# Altium PCB NetworkModule_highspeed V4.PcbDoc (part 3 of 3)
Units mil, origin at the board's own origin, x right, y up, seen from the top; angles counter-clockwise.
Board outline 826.77 x 1421.26 mil, 6 copper layers (Top, GND, Inner3, Inner4, PWR, Bottom), stack 29.136 mil thick; 111 components, 125 nets, 539 pads, 464 vias.
Unrouted connection lines stored in the file: 214.
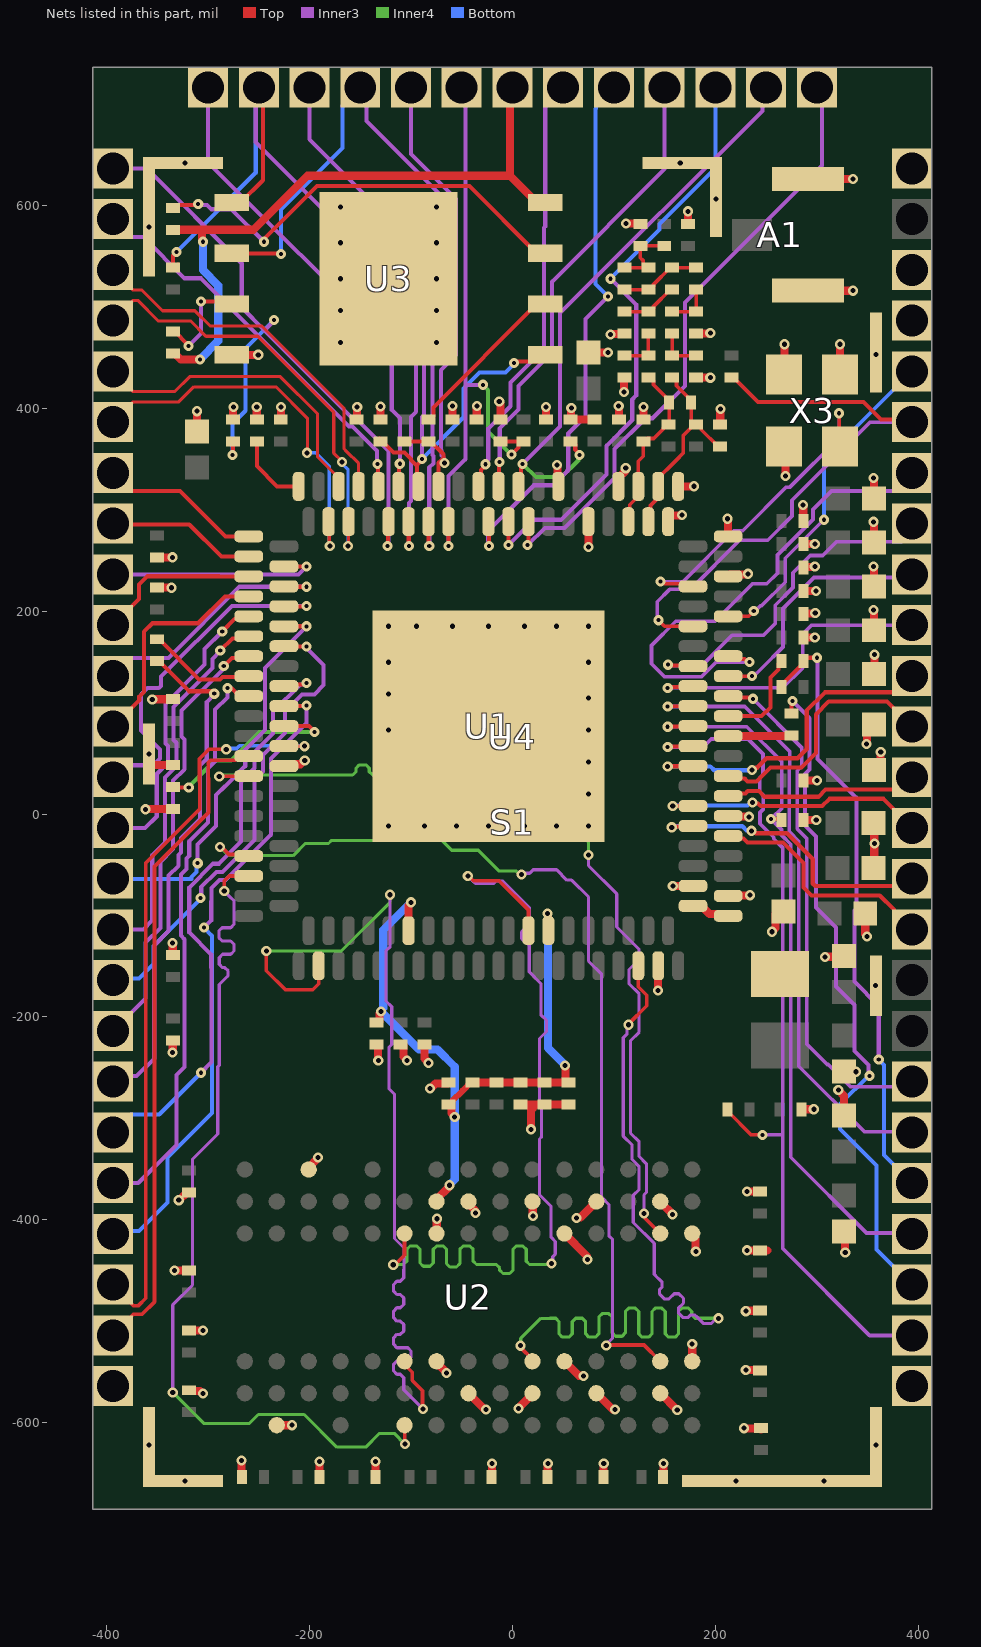
[diagram p7: the nets of this part, all layers, seen from the top]

## Via types
v1: diameter 10, hole 5, Top to Bottom, 398 vias
v2: diameter 10, hole 4, Top to Bottom, 66 vias

## Nets (pads, with @x,y where several pads share a name; then routed paths per layer and width w, separated by ;. In a path a pad name is that pad's centre, name@x,y a point inside that pad or via, vN(x,y) a via of type N, cw(c..) or ccw(c..) an arc to the next point about the centre after c; other vN are vias at no path point) (continued)
DDR_LDQS: U1.113 U2.F7 | length 891.7
  Top w3.63: v1(8,-524) 8,-525.72 20,-537.72 U2.F7@20,-538 ; v1(114.35,-207.71) 114.35,-206.92 132.27,-189 132.27,-178.52 124.02,-170.27 U1.113@124.02,-149.6
  Inner3 w3.1: v1(114.35,-207.71) 113.03,-209.03 113.03,-216.74 109.24,-220.52 109.24,-317.45 117.8,-326.01 117.8,-340.43 124.9,-347.53 124.9,-370.04 119.07,-375.86 119.07,-402.54 139.7,-423.16 139.7,-453.7 143,-457 144.1,-458.1 147.48,-461.48 147.48,-466.11 145.04,-468.55 145.04,-473.18 149.67,-477.81 154.3,-477.81 159.36,-472.76 163.99,-472.76 168.63,-477.39 168.63,-482.02 163.57,-487.08 163.57,-491.71 168.2,-496.34 172.83,-496.34 175.27,-493.9 179.9,-493.9 181,-495 188,-502 196.13,-502 201.13,-497 v1(203,-497)
  Inner4 w3.09: v1(8,-524) 8.24,-523.76 8.24,-516.79 18.66,-506.37 28,-497.03 37,-497.03 ; 37.03,-497 42.63,-497 45.9,-500.27 45.9,-512.25 49.17,-515.52 55.72,-515.52 58.99,-512.25 58.99,-500.27 62.26,-497 68.8,-497 72.07,-500.27 72.07,-512.25 75.35,-515.52 81.89,-515.52 85.16,-512.25 85.16,-495.69 88.43,-492.42 94.98,-492.42 98.25,-495.69 98.25,-511.39 101.52,-514.67 108.06,-514.67 111.33,-511.39 111.33,-490.27 114.61,-487 121.15,-487 124.42,-490.27 124.42,-512.25 127.69,-515.52 134.23,-515.52 137.51,-512.25 137.51,-490.27 140.78,-487 147.32,-487 150.59,-490.27 150.59,-512.25 153.86,-515.52 160.41,-515.52 163.68,-512.25 163.68,-490.27 166.95,-487 173.49,-487 176.77,-490.27 176.77,-493.73 180.04,-497 193,-497 v1(203,-497)
DDR_ODT: U1.74 U2.K9 | length 883
  Top w3.63: v1(-284,-76) -284,-66 -279.02,-61.02 U1.74@-259.84,-61.02 ; v1(-106,-621) -106.15,-620.85 -106.15,-601.15 U2.K9@-106,-601
  Inner3 w3.1: v1(-334.79,-570) -334.79,-483.75 -315.3,-464.27 -315.3,-340.3 -290.41,-315.41 -290.41,-249.09 -289,-247.68 -289,-168.04 -281.77,-160.81 -280.22,-159.26 -280.22,-154.63 -283.49,-151.35 -285.73,-151.35 -289,-148.08 -289,-141.52 -285.73,-138.25 -277.72,-138.25 -274.45,-134.97 -274.45,-128.42 -277.72,-125.15 -286.03,-125.15 -289.31,-121.87 -289.31,-115.32 -286.03,-112.05 -277.72,-112.05 -274.45,-108.77 -274.45,-89.87 -274.45,-85.55 -278.49,-81.51 v1(-284,-76)
  Inner4 w3.09: v1(-334.79,-570) -304.24,-600.54 -259.12,-600.54 -250.4,-591.82 -205.27,-591.82 -173.09,-624 -144.58,-624 -131.04,-610.46 -116.54,-610.46 v1(-106,-621)
DDR_RAS: U1.81 U2.K7 | length 892.3
  Top w3.63: v1(-242.59,-135) -242.59,-154.41 -223.77,-173.23 -196.85,-173.23 -190.95,-167.32 U1.81@-190.95,-149.6 ; U2.K7@-106.3,-539.37 -106.3,-542.72 -98.79,-550.22 -98.79,-558.21 -88.62,-568.38 -88.62,-585.93 v1(-88.24,-586.32)
  Inner3 w3.1: v1(-120.55,-79.6) -120.55,-130.84 -124.65,-134.94 -124.65,-184.31 -119.02,-189.95 -119.02,-227.13 -121.65,-229.76 -121.65,-270.77 -116.22,-276.2 -116.22,-418.41 -106.9,-427.73 -106.9,-448.62 -107.14,-448.85 -107.14,-453 -107.14,-457.19 -110.42,-460.46 -113.87,-460.46 -117.14,-463.74 -117.14,-470.29 -113.87,-473.56 -110.42,-473.56 -107.14,-476.84 -107.14,-483.39 -110.42,-486.67 -113.87,-486.67 -117.14,-489.94 -117.14,-496.49 -113.87,-499.77 -110.42,-499.77 -107.14,-503.04 -107.14,-509.59 -110.42,-512.87 -113.87,-512.87 -117.14,-516.14 -117.14,-522.7 -113.87,-525.97 -103.23,-525.97 -99.95,-529.25 -99.95,-535.8 -103.23,-539.07 -113.87,-539.07 -117.14,-542.35 -117.14,-548.9 -113.87,-552.17 -110.42,-552.17 -107.14,-555.45 -107.14,-557 -107.14,-567.47 -88.3,-586.32 v1(-88.24,-586.32)
  Inner4 w3.09: v1(-242.59,-135) -168.71,-135 -120.55,-86.84 v1(-120.55,-79.6)
DDR_UDM: U1.64 U2.B3 | length 902.7
  Top w3.63: v1(-288.98,37.02) -288.79,37.21 -260.03,37.21 U1.64@-259.84,37.4 ; v1(129.62,-393.67) 130.84,-394.88 130.84,-398.56 U2.B3@145.67,-413.39
  Inner3 w3.1: v1(75,-40.5) 75,-50.91 102.8,-78.71 102.8,-111.39 124.9,-133.49 124.9,-143.26 114.9,-153.26 114.9,-167.28 124.9,-177.28 124.9,-214.91 116.34,-223.46 116.34,-314.51 124.9,-323.07 124.9,-337.49 132,-344.59 132,-372.98 129.62,-375.35 v1(129.62,-393.67)
  Inner4 w3.09: v1(-288.98,37.02) -287.68,38.32 -283.84,38.32 -283.74,38.43 -159,38.43 -157.46,38.43 -154.18,41.7 -154.18,45.16 -150.91,48.43 -144.37,48.43 -141.1,45.16 -141.1,41.7 -137.83,38.43 -131.28,38.43 -128.01,41.7 -128.01,45.16 -124.74,48.43 -118.2,48.43 -114.93,45.16 -114.93,41.7 -111.65,38.43 -105.11,38.43 -101.84,41.7 -101.84,45.16 -98.57,48.43 -92.02,48.43 -88.75,45.16 -88.75,41.7 -85.48,38.43 -78.94,38.43 -75.67,41.7 -75.67,45.16 -72.39,48.43 -65.85,48.43 -62.58,45.16 -62.58,41.7 -59.31,38.43 -43,38.43 8.57,38.43 75,-28 v1(75,-40.5)
DDR_UDQS: U1.72 U2.B7 | length 947.3
  Top w3.63: v1(-288.38,-32.62) -286.66,-32.62 -279.47,-39.81 -261.37,-39.81 U1.72@-259.84,-41.34 ; v1(92.45,-523.78) 92.92,-523.3 129.6,-523.3 U2.B7@145.67,-539.37
  Inner3 w3.1: v1(9.07,-59.72) 10.39,-58.4 16.97,-58.4 20.39,-54.98 43.52,-54.98 53.65,-65.11 58.33,-65.11 74.9,-81.68 74.9,-144.94 87.93,-157.98 87.93,-377.7 95.04,-384.81 95.04,-415.62 98.74,-419.33 98.74,-516.42 92.45,-522.72 v1(92.45,-523.78)
  Inner4 w3.09: v1(-288.38,-32.62) -287.95,-32.62 -279.57,-41 -216.11,-41 -204.19,-29.09 -181.27,-29.09 -178.12,-25.93 -130.96,-25.93 -130.41,-25.38 -70.19,-25.38 -59.83,-35.74 -33.54,-35.74 -13.01,-56.26 3.74,-56.26 7.2,-59.72 v1(9.07,-59.72)
DDR_VREF: C4.1 C5.1 C11.2 C12.1 C13.1 R1.1 R2.2 U1.90 U1.104 U2.J2 | length 728.7
  Top w6: C4.1@-61.02,-286.42 -59.1,-284.5 -59.1,-282.58 -49.1,-272.58 -49.1,-272.53 -40.57,-264 C11.2@-38,-264
  Top w8: C12.1@-133.8,-205.1 -133.49,-204.79 -130.97,-204.79 -130.97,-196.53 -129.57,-195.12 v1(-129.57,-194.58) ; U1.90@-102.36,-114.96 -102.36,-90.03 -99.9,-87.57 v1(-99.9,-87.03) ; U2.J2@-74.8,-381.89 -74.8,-379.73 -62.51,-367.43 -62.51,-366.25 v1(-62.13,-365.87) ; C4.1@-62.99,-286.42 -61.02,-286.42 -60.1,-287.34 -60.1,-294.97 -56.9,-298.17 v1(-56.9,-298.71) ; C11.2@-39.37,-264.76 R1.1@-15.75,-264.76 R2.2@7.87,-264.76 C13.1@31.5,-264.76 52.23,-264.76 52.23,-248.78 51.76,-248.32 v1(51.76,-247.77) ; v1(34.7,-97.98) 35.07,-98.35 35.07,-114.59 U1.104@35.43,-114.96
  Bottom w8: v1@-129.57,-194.04 -128.57,-193.04 -128.57,-192.26 -127.34,-191.03 -127.34,-114.47 v1@-100.29,-87.41 ; v1@-129.15,-195 -92.15,-232 -74,-232 -56.9,-249.1 -56.9,-299.26 -56.9,-360.19 -62.13,-365.42 v1(-62.13,-365.87) ; v1(34.7,-97.98) 35,-98.28 35,-230.47 51.76,-247.23 v1(51.76,-247.77)
DDR_WE: U1.102 U2.K3 | length 877.7
  Top w3.63: v1(-117.46,-444.2) -115.73,-444.2 -110.51,-438.98 ; -110.47,-438.98 -106.39,-434.91 -106.39,-414.39 U2.K3@-106,-414 ; v1(-44,-61) -43.45,-61 -38.69,-65.76 -13.18,-65.76 15.75,-94.69 U1.102@15.75,-114.96
  Inner3 w3.1: v1(-44,-61) -36.47,-68.53 -18.48,-68.53 -16.01,-66.06 -9.62,-66.06 16.61,-92.29 16.61,-95 16.61,-109.65 13.34,-112.93 12.18,-112.93 8.91,-116.2 8.91,-122.75 12.18,-126.03 13.34,-126.03 16.61,-129.3 16.61,-145 16.61,-155.61 28,-167 28,-177.62 28,-197.88 33.53,-203.4 33.53,-214.32 26.63,-221.22 26.63,-283.52 28.75,-285.65 28.75,-318.23 26.63,-320.35 26.63,-375.29 38.1,-386.76 38.1,-417.27 42.13,-421.3 42.13,-433.74 39.67,-436.2 39.67,-441.56 v1(38.35,-442.88)
  Inner4 w3.09: v1(-117.46,-444.2) -117.25,-444 -109,-444 -107.46,-444 -104.18,-440.73 -104.18,-429 -100.91,-425.73 -94.37,-425.73 -91.1,-429 -91.1,-442.45 -87.83,-445.72 -81.28,-445.72 -78.01,-442.45 -78.01,-429 -74.74,-425.73 -68.2,-425.73 -64.93,-429 -64.93,-443.16 -61.65,-446.44 -55.11,-446.44 -51.84,-443.16 -51.84,-429 -48.57,-425.73 -42.02,-425.73 -38.75,-429 -38.75,-440.73 -35.48,-444 -15.85,-444 -12.58,-447.27 -12.58,-449.64 -9.31,-452.91 -2.77,-452.91 0.51,-449.64 0.51,-429 3.78,-425.73 10.32,-425.73 13.59,-429 13.59,-440.73 16.86,-444 20,-444 37.22,-444 v1(38.35,-442.88)
EPHY_VRT: R23.1 U1.39 | length 73.8
  Top w4: R23.1@-251.97,367.13 -251.97,342.97 -231.84,322.84 U1.39@-210.63,322.84
ETH_RN: U1.34 U4.B4 | length 433.6
  Top w3.12: U4.B4@-393.7,486.22 -373.76,506.16 -369.34,506.16 -349.05,485.87 -317.12,485.87 -302.12,470.88 -251.19,470.88 -176.11,395.8 -176.11,355.71 -168,347.6 v1(-168,347) ; v1(-162,264) -161.71,264.29 -161.71,287.9 U1.34@-161.42,288.19
  Bottom w3.12: v1(-168,347) -168,345.31 -162,339.31 v1(-162,264)
ETH_RP: U1.33 U4.B3 | length 367.3
  Top w3.12: U4.B3@-393.7,536.22 -373.76,516.28 -365.15,516.28 -344.86,495.99 -312.93,495.99 -297.93,481 -247,481 -165.99,399.99 -165.99,359.9 -163.65,357.56 -151.58,345.51 U1.33@-151.58,322.84
ETH_TN: U1.36 U4.B6 | length 384.2
  Top w3.12: U4.B6@-393.7,386.22 -373.76,406.16 -328.84,406.16 -314,421 -233.07,421 -202.12,390.05 -202.12,356.44 v1(-202.56,356) ; U1.36@-181.1,288.19 -180.55,287.64 -180.55,264.55 v1(-180,264)
  Bottom w3.12: v1(-202.56,356) -193.79,356 -180.55,342.76 -180.55,264.55 v1(-180,264)
ETH_TP: U1.35 U4.B5 | length 311.4
  Top w3.12: U4.B5@-393.7,436.22 -373.76,416.28 -333.03,416.28 -318.19,431.12 -228.88,431.12 -192,394.24 -192,351.84 -171.26,331.1 U1.35@-171.26,322.84
GND: A1.2 A1.3 C1.2 C2.2 C3.2 C4.2 C5.2 C6.2 C7.2 C8.2 C9.2 C10.2 C12.2 C13.2 C14.2 C15.2 C16.2 C17.2 C18.2 C19.2 C20.2 C21.2 C22.2 C23.2 C24.2 C25.2 C26.2 C27.2 C28.2 C29.2 C30.2 C31.2 C32.2 C33.2 C34.2 C35.2 C36.2 C37.2 C38.2 C39.2 C40.2 C41.2 C42.2 C43.2 C44.2 C45.2 C46.2 C47.2 C48.2 C49.2 C50.2 C51.1 C52.2 C54.2 C55.2 C58.2 C61.2 C62.2 C63.1 C64.2 C65.2 C66.2 C67.2 C68.2 C69.2 C70.2 C71.2 C72.2 C73.2 L5.2 R2.1 R8.1 R15.1 R17.1 R18.1 R19.1 R23.2 R24.2 S1.1 S1.2 S1.3 S1.4 S1.5 S1.6 S1.7 S1.8 S1.9 S1.10 S1.11 U1.1 U1.2 U1.7 U1.10 U1.13 U1.63 U1.115 U1.120 U1.121 U1.128 U1.152 U1.156 U1.157 U2.A3 U2.A7 U2.B2 U2.B8 U2.D2 U2.D8 U2.E3 U2.E7 U2.F2 U2.F8 U2.H2 U2.H8 U2.J3 U2.J7 U2.N1 U2.P9 U3.4 U3.9 U4.B25 U4.C1 U4.C3 U4.C4 U4.C25 X3.1 X3.2 X3.4 | length 2055.8
  Top w8: v1(-361.55,4.65) -361.42,4.79 -334.78,4.79 R24.2@-334.65,4.92 ; S1.2@-358,58 -358,49.87 -356.36,48.23 C34.2@-334.65,48.23 ; v1(-355,113) -354.9,113.1 -334.74,113.1 C23.2@-334.65,113.19 ; C14.2@-350.39,223.43 -350.18,223.21 -336.21,223.21 v1(-336,223) ; C16.2@-350.39,252.95 v1(-335,253) ; v1(-335,-235) -334.82,-234.82 -334.82,-223.6 C3.2@-334.65,-223.42 ; v1(-335,-127) -334.82,-127.18 -334.82,-138.6 C1.2@-334.65,-138.78 ; v1(-333,-450) -332.9,-449.9 -319,-449.9 C73.2@-318.9,-449.8 ; v1(-328.9,-380.62) -328.45,-380.62 -320.87,-373.03 C9.2@-318.9,-373.03 ; C71.2@-318.9,-567.91 -317.98,-568.84 -307.79,-568.84 -305.54,-571.09 v1(-305,-571.09) ; C72.2@-318.9,-508.86 -318.83,-508.93 -305.07,-508.93 v1(-305,-509) ; C35.2@-311,377 v1@-311,396 ; U3.4@-276.55,452.56 v1(-250.55,452.56) ; R17.1@-275.59,388.78 -275.3,389.08 -275.3,400.7 v1(-275,401) ; v1(-267,-637) -266.87,-637.13 -266.87,-653.41 C10.2@-266.73,-653.54 ; R23.2@-251.97,388.78 v1(-252,401) ; U2.P9@-232.28,-602.36 v1(-217.1,-602.36) ; v1(-228,401) -228.17,400.83 -228.17,389.7 C17.2@-227.64,389.17 ; U1.63@-225.2,47.25 -223.38,49.07 -209.02,49.07 -205.25,52.84 v1(-204.71,52.84) ; U2.N1@-200.79,-350.39 -200.79,-348.24 -191.55,-339 v1(-191.55,-338.46) ; C70.2@-189.96,-653.54 v1(-190,-638) ; C15.2@-153.27,388.8 -153.27,400.73 v1(-153,401) ; v1(-135,-638) -134.92,-638.08 -134.92,-653.46 C67.2@-134.84,-653.54 ; C12.2@-133.86,-227.36 -133.51,-227.36 -132.59,-228.28 -132.59,-242.62 v1(-132.2,-243) ; R18.1@-129.92,388.78 v1(-129.92,401.57) ; C22.2@-110.24,-227.36 -108.27,-227.36 -107.35,-228.28 -107.35,-239.11 -104,-242.46 v1(-104,-243) ; C20.2@-86.61,-227.36 -86.61,-228.09 -86.81,-228.28 -86.81,-241.1 -82.58,-245.33 v1(-82.58,-245.45) ; v1(-81.09,-270.43) -80.55,-270.43 -75.8,-265.69 -63.91,-265.69 C4.2@-62.99,-264.76 ; U2.J7@-74.8,-539.37 -74.8,-540.65 -65,-550.46 v1(-65,-551) ; U2.J3@-74.8,-413.39 -74.59,-413.18 -74.59,-399.1 v1(-74.38,-398.88) ; C19.2@-59.03,388.81 v1@-59.03,401.55 ; U2.H8@-43.31,-570.87 -27.56,-586.62 -26.38,-586.62 v1(-26,-587) ; U2.H2@-43.31,-381.89 -43.31,-384.05 -36.84,-390.53 -36.84,-392.91 v1(-36.45,-393.29) ; C24.2@-35.43,388.78 -35.22,389 -35.22,401.36 v1@-35.43,401.57 ; v1@-35.22,401.78 v1(-35,402) ; C69.2@-20.67,-653.54 -20.33,-653.21 -20.33,-640.33 v1(-20,-640) ; v1(-13,406.43) -13,405.89 -11.91,404.8 -11.91,389.7 -11.81,389.61 R19.1@-11.81,388.78 ; v1(6,-586) 6,-585.46 19.68,-571.77 U2.F8@19.68,-570.87 ; R2.1@9.84,-286.42 23.37,-286.42 ; v1(18.2,-310.74) 18.2,-291.59 23.37,-286.42 ; U2.F2@19.68,-381.89 19.98,-382.19 19.98,-395.85 v1(20.28,-396.15) ; C43.2@33,388.83 v1(33,401) ; C68.2@34.45,-653.54 34.72,-653.27 34.72,-640.28 v1(35,-640) ; v1(44,344) 44.38,343.62 44.38,323.73 U1.13@45.28,322.84 ; U2.E7@51.18,-539.37 65.43,-553.62 69.62,-553.62 v1(70,-554) ; U2.E3@51.18,-413.39 73.61,-435.81 73.61,-438.62 v1(73.99,-439) ; C5.2@56.74,-286.42 31.62,-286.42 23.37,-286.42 ; v1(58,399.99) 57.62,399.61 57.62,389.75 56.7,388.83 55.3,388.83 C46.2@81,388.83 ; v1(63.18,-398) 63.56,-397.62 66.95,-397.62 U2.D2@82.68,-381.89 ; U1.10@74.8,288.19 74.9,288.09 74.9,263.1 v1(75,263) ; C42.2@74.8,454.72 74.87,454.79 94.28,454.79 v1(94.35,454.86) ; U2.D8@82.68,-570.87 98.43,-586.62 100.62,-586.62 v1(101,-587) ; C8.2@89.57,-653.54 89.78,-653.33 89.78,-640.22 v1(90,-640) ; v1(96.56,472.44) 96.56,473.21 110.02,473.21 L5.2@110.24,473.43 ; U1.7@104.33,322.84 104.33,331.18 111.32,338.16 111.32,340.45 v1(111.7,340.84) ; v1@104.7,403.05 105,402.75 C47.2@105,388.83 ; v1(110,416) 110.12,416.12 110.12,430 C55.2@110.24,430.12 ; v1(112,582) 112.15,581.85 125.83,581.85 C61.2@125.98,581.69 ; C51.1@129,388.83 129.04,388.87 129.04,401.01 v1(129.08,401.05) ; v1(143.35,-174) 143.53,-173.83 143.53,-149.78 U1.115@143.7,-149.6 ; U2.B8@145.67,-570.87 145.8,-570.87 162.28,-587.35 v1(162.4,-587.35) ; U2.B2@147,-383 147,-383.57 157.83,-394.4 v1(157.83,-394.74) ; C7.2@148.62,-653.54 148.81,-653.35 148.81,-640.19 v1(149,-640) ; U1.2@153.54,288.19 153.54,292.34 155.44,294.23 166.58,294.23 v1(166.97,294.62) ; v1(158.06,-70.94) v1(158.06,-70.94) 177.91,-70.9 U1.121@177.95,-70.86 ; U1.1@163.39,322.84 163.47,322.92 178.92,322.92 v1(179,323) ; v1(173,594) 173.11,593.89 173.11,581.81 C62.2@173.23,581.69 ; U2.A7@177.16,-539.37 v1(177.16,-522.37) ; U2.A3@177.16,-413.39 177.16,-415.55 180.34,-418.72 180.34,-430.7 v1(180.72,-431.09) ; C54.2@181.1,430.12 181.16,430.06 194.94,430.06 v1(195,430) ; C58.2@181.1,473.43 181.39,473.71 194.71,473.71 v1(195,474) ; C52.2@201.83,384.75 204.86,384.75 204.86,398.86 v1(205,399) ; v1(212,291) 212.3,290.7 212.3,273.92 U1.156@212.6,273.62 ; U1.120@212.6,-80.71 212.95,-80.35 233.65,-80.35 v1(234,-80) ; U1.128@212.6,-1.97 212.99,-2.36 232.8,-2.36 v1(233.18,-2.74) ; U1.152@212.6,234.25 214.42,236.08 230.99,236.08 231.64,236.73 v1(232.18,236.73) ; v1(228.35,-605.32) 228.73,-605.7 244.48,-605.7 C2.2@245.08,-606.3 ; v1(230,-548) 230.11,-548.11 243.98,-548.11 C65.2@244.09,-548.23 ; v1(230,-490) 230.38,-489.62 243.65,-489.62 C64.2@244.09,-489.17 ; v1(231,-430) 231.06,-430.06 245.08,-430.06 251.02,-430.06 251.07,-430.12 ; v1(231,-372) C6.2@241.95,-372 ; v1(255.72,-116) 255.72,-115.92 259.19,-112.45 259.19,-98.38 C26.2@262.19,-95.38 ; X3.1@268,437.29 v1(268,463) ; v1(269,333) X3.2@269,356.98 ; C50.2@284.83,-291 v1(297,-291) ; v1(286.32,304.64) 286.58,304.39 286.58,289.25 C45.2@286.83,289 ; C39.2@286.41,264.77 287.64,266 v1(298,266) ; R8.1@286.83,-6 v1(299.41,-6) ; C63.1@286.85,33.03 v1@300.03,33.03 ; C18.2@286.83,197 287.53,197.7 298.03,197.7 v1(298.41,198.09) ; C41.2@287.05,219.53 287.39,219.87 299,219.87 v1(299.13,219.74) ; C37.2@287.25,243 287.25,243.12 287.75,243.62 297.62,243.62 v1(298,244) ; C21.2@291.23,174 v1(298,174) ; A1.2@291.34,515.75 v1(335.77,515.75) ; A1.3@291.34,625.98 v1(335.77,625.98) ; v1(308,-141) 308.38,-140.62 318.96,-140.62 322.83,-136.74 C31.2@322.83,-136.53 ; v1(321.16,-272.16) 326.89,-277.89 326.89,-293.19 C49.2@322.83,-297.24 ; C48.2@322.83,-411.42 327.62,-416.2 327.62,-431.62 v1(328,-432) ; C30.2@322.99,-253.99 v1(338.59,-253.99) ; X3.4@323,437.17 v1(323,463) ; C25.2@347.72,-94.06 347.72,-118.33 349.42,-120.03 v1(349.42,-120.57) ; C27.2@348.3,-55.12 C27.2@348.65,-55.47 ; v1(349,69) 349.38,69.38 349.38,80.95 C32.2@356.43,88 ; C28.2@355.85,-9 C28.2@355.92,-9.08 ; C27.2@356,-54 356.62,-53.38 356.62,-29.38 v1(357,-29) 356.62,-28.62 356.62,-12.38 C28.2@358,-11 ; v1(356,201) 356.15,200.85 356.15,181.25 C40.2@356.3,181.1 C40.2@356.3,185 ; v1(356,244) 356.15,243.85 356.15,224.56 C36.2@356.3,224.41 C36.2@356.3,230 ; v1(356,288) 356.15,287.85 356.15,262.54 356.62,262.08 356.3,261.76 C38.2@356.3,268 ; v1(356,331) 356.15,330.85 356.15,311.17 C44.2@356.3,311.02 ; C29.2@356.3,43.31 362.62,49.63 362.62,60.62 v1(363,61) ; C33.2@356.3,137.8 357,138.5 v1@357,156
  other v1: -322.83,-657.48 220.47,-657.48 307.09,-657.48 -358.27,-622.05 358.27,-622.05 358,-169 -122.05,-11.81 -86.61,-11.81 -55.12,-11.81 -23.62,-11.81 11.81,-11.81 43.31,-11.81 74.8,-11.81 74.8,19.69 300.06,33.06 74.8,51.18 -358.27,59.06 -122.05,82.68 74.8,82.68 74.8,114.17 -122.05,118.11 -122.05,149.61 74.8,149.61 357,157 -122.05,185.04 -94.49,185.04 -59.06,185.04 -23.62,185.04 11.81,185.04 43.31,185.04 74.8,185.04 -311,397 -59,402 104.7,402.05 358.27,452.76 -169.29,464.57 -74.8,464.57 -169.29,496.06 -74.8,496.06 -169.29,527.56 -74.8,527.56 -169.29,562.99 -74.8,562.99 -358.27,578.74 -169.29,598.43 -74.8,598.43 200.79,606.3 -322.83,641.73 165.35,641.73
I2C_SCL: U1.20 U4.A5 | length 550.5
  Top w4: U1.20@-23.62,288.19 -23.31,287.88 -23.31,264.31 v2(-23,264)
  Inner3 w4: v2(-23,264) -24,265 -24,279 21,324 40.56,324 54,337.44 54,338.29 55,339.29 55,375 72,392 72,487.65 v2(94.35,510)
  Bottom w4: v2(94.35,510) 82,522.35 82,694.98 82.31,695.3 82.31,698.53 91.78,708 U4.A5@103.81,708
I2C_SDA: U1.21 U4.A6 | length 427.8
  Top w4: U1.21@-33.46,322.84 -30.88,325.42 -30.88,339.18 -26.68,343.38 v2(-26.68,344.74)
  Inner3 w4: v2(-26.68,344.74) -26.68,346.36 -23.82,349.22 -23.82,380.06 -2,401.88 -2,425.31 31,458.31 31,577.77 32.31,579.08 32.31,698.53 44.78,711 U4.A6@52,711
I2S_CLK: U1.19 U4.A4 | length 461.2
  Top w4: U1.19@-13.78,322.84 -13.3,323.31 -13.3,346.52 v2(-12.82,347)
  Inner3 w4: v2(-12.82,347) -12.53,347.29 -12.53,380.03 6,398.57 6,422 39,455 39,524.56 150,635.56 U4.A4@150,716.22
I2S_SDI: U1.16 U4.A1 | length 601
  Top w4: v2(15,265) 15.75,265.75 U1.16@15.75,288.19
  Inner3 w4: v2(15,265) 32,282 51.31,282 100.7,331.39 100.7,359.6 131.14,390.05 138.05,390.05 170,422 170,504.11 305,639.11 U4.A1@305,707
I2S_SDO: R15.2 U1.17 U4.A2 | length 581.7
  Top w4: U1.17@5.91,322.84 8.49,325.42 8.49,341.87 10,343.38 v2(10,345) ; R15.2@57,367.17 58.97,367.17 61.89,364.25 61.89,359.34 66,355.23 v2(66,354)
  Inner3 w4: v2(10,345) 36.35,371.35 47,382 47,493.56 246.32,692.88 246.32,711.32 U4.A2@249,714
  Inner4 w4: v2@11,344 23,332 48.56,332 64.85,348.3 64.85,352.85 v2(66,354)
I2S_WS: U1.18 U4.A3 | length 592.6
  Top w4: v2(-4,265) -3.94,265.06 U1.18@-3.94,288.19
  Inner3 w4: v2(-4,265) 21,290 48,290 92.7,334.7 92.7,362.92 118.08,388.3 118.08,408.52 122,412.44 122,502.11 v2(96.55,527.56)
  Bottom w4: v2(96.55,527.56) 145,576 145,581.56 146.22,582.78 200,636.56 U4.A3@200,713
IO11: U1.29 U4.A13 | length 472.2
  Top w4: U1.29@-112.2,322.84 -111.6,323.44 -111.6,344.6 v2(-111,345.2)
  Inner3 w4: U4.A13@-300,716.22 -300,642.33 -118.92,461.25 -118.92,398.37 -111,390.44 v2(-111,345.2)
IO14: U1.40 U4.B7 | length 158
  Top w4: U4.B7@-385,338 -385,327.52 -376.01,318.53 -327.53,318.53 -282.62,273.62 U1.40@-259.84,273.62
IO15: U1.42 U4.B8 | length 143.7
  Top w4: U4.B8@-389,289 -385.53,285.53 -318.53,285.53 -286.94,253.94 U1.42@-259.84,253.94
IO16: U1.43 U4.B9 | length 214.6
  Top w4: U1.43@-225.2,244.1 -203.1,244.1 v2(-203,244)
  Inner3 w4: U4.B9@-392,236 -211,236 v2(-203,244)
IO17: U1.44 U4.B10 | length 160.4
  Top w4: U4.B10@-389,186 -389,190.92 -367.89,212.03 -367.89,226.22 -359.77,234.35 -289.28,234.35 -289.19,234.25 U1.44@-259.84,234.25
IO38: R8.2 U1.137 U4.C22 | length 720.4
  Top w3.63: v2(153,86) 153.31,86.31 177.64,86.31 U1.137@177.95,86.62 ; v2(254.82,-5) R8.2@267,-5
  Inner3 w3.63: v2(153,86) 231,86 265.32,51.68 265.32,5.51 255.82,-4 v2@255,-4 ; v2(254.82,-5) 265.11,-15.29 265.11,-20.75 274.18,-29.82 274.18,-338.18 349,-413 U4.C22@398,-413
IO44: U1.144 U4.C7 | length 487
  Top w3.63: U1.144@212.6,155.51 215.26,152.85 228.7,152.85 231.78,149.78 v2(233.5,149.78)
  Inner3 w3.63: v2(233.5,149.78) 200.87,149.78 186.28,135.18 149.82,135.18 137,148 137,166 161,190 199.7,190 236.52,226.82 250.65,226.82 261.2,237.36 261.2,255.29 296.18,290.28 296.18,300.18 314.35,318.35 380.35,318.35 U4.C7@391,329
JTAG_TCK: U1.140 U4.C19 | length 500.4
  Top w3.63: U1.140@212.6,116.14 213.97,114.77 235.78,114.77 v2(237,113.55)
  Inner3 w3.63: v2(237,113.55) 285,65.55 285,46.93 280.59,42.52 280.59,-14.65 289.9,-23.96 289.9,-226.46 310.35,-246.91 311.2,-246.91 333.12,-268.82 375.83,-268.82 U4.C19@380,-264.65
JTAG_TDI: U1.142 U4.C9 | length 237
  Top w3.63: U1.142@212.6,135.83 212.68,135.91 235.91,135.91 v2(236,136)
  Inner3 w3.63: v2(236,136) 237.72,136 240.48,138.76 240.76,138.76 245.68,143.68 266.57,164.57 266.57,202.48 297.28,233.18 386.82,233.18 U4.C9@387,233
JTAG_TDO: U1.143 U4.C8 | length 343.8
  Top w3.63: v2(153.15,147.15) 153.89,146.41 177.21,146.41 U1.143@177.95,145.67
  Inner3 w3.63: v2(153.15,147.15) 154.3,146 186.3,146 216.48,176.18 247.48,176.18 258.94,187.64 258.94,205.64 276.47,223.17 276.47,237.76 293.52,254.82 305.91,254.82 319.45,268.35 383.35,268.35 U4.C8@396,281
JTAG_TMS: U1.141 U4.C10 | length 310.7
  Top w3.63: v2(153,124.37) 153.81,125.18 177.14,125.18 U1.141@177.95,125.99
  Inner3 w3.63: v2(153,124.37) 266.37,124.37 286,144 286,177.3 294.7,186 U4.C10@393,186
JTAG_TRST: U1.139 U4.C20 | length 616.4
  Top w3.63: v2(153,106) 153.15,106.15 177.8,106.15 U1.139@177.95,106.3
  Inner3 w3.63: v2(153,106) 229,106 273.3,61.7 273.3,46.02 272.96,45.69 272.96,-17.81 282.27,-27.12 282.27,-248.57 346.7,-313 U4.C20@394,-313
LXBK: L1.1 U1.118 U1.119 | length 37.4
  Top w8: U1.119@177.95,-90.55 186.29,-90.55 194.31,-98.57 208.57,-98.57 U1.118@211,-101
PCIE_CKN: U1.132 U4.C12 | length 247.8
  Top w4.09: U1.132@213.2,37.4 215.77,34.83 228.9,34.83 231.54,32.19 240.69,32.19 254.44,45.93 284.93,45.93 299.09,60.09 299.09,98.26 311.68,110.85 369.07,110.85 U4.C12@393.7,86.22
PCIE_CKP: U1.133 U4.C11 | length 328.3
  Top w4.09: v1(153,47) 153.12,47.12 177.83,47.12 U1.133@177.95,47.25 ; v1(236.12,43.23) 237.72,43.23 240.12,45.64 241.28,45.64 250.67,55.03 281.17,55.03 290,63.86 290,102.03 307.91,119.94 377.42,119.94 U4.C11@393.7,136.22
  Bottom w4.08: v1(153,47) 195,47 198.88,43.12 236,43.12 v1(236.12,43.23)
PCIE_RXN: U1.130 U4.C13 | length 193.4
  Top w4.09: U1.130@212.6,17.72 215.17,20.29 229.67,20.29 231.91,22.53 242.84,22.53 248.42,16.95 301.49,16.95 308.63,24.09 381.57,24.09 U4.C13@393.7,36.22
PCIE_RXP: U1.129 U4.C14 | length 273.9
  Top w4.09: v1(158,8) 158.06,7.94 177.89,7.94 U1.129@177.95,7.88 ; v1(236.49,11.49) 237.62,10.36 242.17,10.36 244.66,7.86 305.26,7.86 312.39,15 365.54,15 376.06,4.48 376.06,3.86 U4.C14@393.7,-13.78
  Bottom w4.08: v1(158,8) 158.3,8.3 231.7,8.3 234.89,11.49 v1(236.49,11.49)
PCIE_TXN: U1.126 U4.C16 | length 234.5
  Top w4.09: U1.126@212.6,-21.65 215.17,-24.22 227.81,-24.22 231.62,-28.03 266.63,-28.03 286.91,-48.3 286.91,-72.42 294.63,-80.14 362.03,-80.14 376.06,-94.17 376.06,-96.14 U4.C16@393.7,-113.78
PCIE_TXP: U1.127 U4.C15 | length 300.2
  Top w4.09: v1(157,-13.1) 157.65,-12.46 177.31,-12.46 U1.127@177.95,-11.81 ; v1(235.77,-16.56) 237.37,-16.56 239.75,-18.93 270.4,-18.93 296,-44.54 296,-68.66 298.4,-71.05 386.43,-71.05 U4.C15@393.7,-63.78
  Bottom w4.08: v1(157,-13.1) 158.1,-12 226.51,-12 230.62,-16.1 235.31,-16.1 v1(235.77,-16.56)
PERST_N: R16.1 U1.135 U4.C24 | length 858.4
  Top w3.63: v2(153,66) 153.47,66.47 177.49,66.47 U1.135@177.95,66.93 ; R16.1@212.17,-291 212.17,-292.97 235.44,-316.23 v2(246.36,-316.23)
  Inner3 w3.63: v2(153,66) 188,66 196,74 232.2,74 246.93,59.27 246.93,38.75 243.69,35.51 243.69,22.01 247.31,18.39 247.31,4.9 244,1.59 244,-9.48 257.47,-22.95 257.47,-24.44 266.54,-33.51 266.54,-316 266.54,-428.54 352,-514 U4.C24@394,-514 ; v2(246.36,-316.23) 246.59,-316 266,-316
PORST_N: R11.2 R13.1 U4.C21 | length 605.3
  Top w4: R13.1@265.06,126.97 R11.2@285.91,147.81 ; R11.2@287.75,153.89 287.86,154 v2(300,154)
  Top w8: R13.1@265.06,125 R13.1@265.06,126.97 ; R11.2@286.83,151 286.83,152.97 R11.2@287.75,153.89
  Inner3 w4: v2(300,154) 300.82,153.18 300.82,54.18 339,16 339,-93.22 337,-95.22 337,-165 361,-189 v2(361,-242)
  Bottom w4: v2@361,-242.54 366.01,-247.56 366.01,-336.09 376.01,-346.09 U4.C21@393.7,-363.78
  Bottom w8: v2@361,-242.54 v2(361,-242)
PORST_N_1: R11.1 U1.138 | length 95.6
  Top w4: U1.138@212.6,96.46 245.46,96.46 254.14,105.14 254.14,134.37 262.25,142.49 262.25,148.08 R11.1@265.17,151
PWM0: U1.45 U4.B11 | length 237.1
  Top w4: U1.45@-225.2,224.41 -224.79,224 v2(-203,224)
  Inner3 w4: U4.B11@-385,144.92 -376.01,153.91 -338.96,153.91 -268.87,224 v2(-203,224)
PWM1: U1.46 U4.B12 | length 204.6
  Top w4: U4.B12@-380,99.92 -367.79,112.13 -367.79,115.77 -363.28,120.27 -363.28,179.65 -354.93,188 -310,188 -283.43,214.57 U1.46@-259.84,214.57
REF_CLKO: R10.1 U4.C23 | length 663
  Top w4: R10.1@275,98.83 275,110.43 v2(275.89,111.32)
  Inner3 w4: v2(275.89,111.32) 292.82,94.39 292.82,43.69 288.41,39.29 288.41,-11.41 299,-22 299,-92 319,-112 319,-170 337,-188 337,-233.56 350.85,-247.41 350.85,-256.85 v2(352,-258)
  Bottom w4: v2(352,-258) 350.87,-258 323,-285.87 323,-310.27 359,-346.27 359,-429.08 388,-458.08 U4.C23@388,-464
REF_CLKO_1: R10.2 U1.136 | length 62.5
  Top w8: U1.136@212.6,76.77 212.8,76.97 R10.2@274.97,76.97
RF_DIFF+: C56.1 C59.2 L5.1 | length 57.3
  Top w3.63: L5.1@110,494 111.08,495.08 C56.1@132,495.08 ; C56.1@132,497 137.75,497 138.93,498.18 138.93,500.15 155.51,516.73 C59.2@157.48,516.73
RF_DIFF-: C57.1 C58.1 L4.1 | length 45.7
  Top w3.63: C57.1@157.48,495.08 C58.1@181.1,495.08 C58.1@182,496 ; C58.1@181,496 181.1,496.1 L4.1@181.1,516.73
RF_HP+: C55.1 C56.2 L2.2 | length 45.9
  Top w3.63: C55.1@110,450 111.77,451.77 L2.2@133.86,451.77 133.86,472.86 C56.2@134,473
RF_HP-: C54.1 C57.2 L3.2 | length 47.3
  Top w3.63: C57.2@158,474 157.48,473.48 C57.2@157.48,473.43 L3.2@157.48,451.77 C54.1@181.1,451.77 181.23,451.77 C54.1@182,451
RF_LP: C60.1 C61.1 L6.2 L7.1 | length 74.1
  Top w3.63: C60.1@110,537 111.39,538.39 L6.2@133.86,538.39 131.89,538.39 128.79,541.49 128.79,545.43 125.98,548.23 C61.1@125.98,560.04 127.95,560.04 L7.1@149.61,560.04
RF_LP+: C51.2 C53.1 L2.1 R9.1 U1.5 U1.6 | length 165.7
  Top w3.63: U1.6@114.17,288.19 115.58,289.6 115.58,304.88 U1.5@124.02,313.32 ; U1.5@124.02,322.84 124.02,347.72 128.83,352.53 128.83,365.83 C51.2@130.13,367.13 ; C51.2@129.92,367.13 132.85,370.05 139.25,370.05 148.93,379.73 148.93,380.72 150.1,381.89 154.53,381.89 C53.1@154.53,405.51 ; L2.1@134,430 135.94,430 138.93,427.01 138.93,423.08 154.53,407.48 C53.1@154.53,405.51 C53.1@155,406
RF_LP-: C52.1 C53.2 L3.1 R12.1 U1.3 U1.4 | length 208
  Top w3.63: U1.4@133.86,288.19 136.07,290.4 136.07,304.07 141.04,309.04 141.04,328.44 161.11,348.51 168.39,355.8 168.39,373.09 178.31,383 183.9,383 186.17,380.72 186.17,378.75 202.76,362.17 C52.1@204.72,362.17 ; L3.1@157.48,430.12 158.53,430.12 161.64,427.01 161.64,422.02 176.18,407.48 C53.2@176.18,405.73 ; C53.2@176,406 176,403.73 C53.2@177.36,402.36 ; R12.1@178.56,384.56 176.18,386.93 176.18,401.18 C53.2@179,404
RF_NOTCH: C59.1 C60.2 L4.2 L6.1 | length 83.7
  Top w3.63: C60.2@110,516 110.73,516.73 L6.1@133.86,516.73 ; L6.1@134,516 135.09,516 138.93,519.84 138.93,521.81 155.51,538.39 C59.1@157.48,538.39 L4.2@181.1,538.39 182.61,538.39 L4.2@183,538
RXD0: U1.31 U4.B2 | length 379.7
  Top w4: v2(-133,345) -132.44,344.44 -132.44,323.39 U1.31@-131.89,322.84
  Inner3 w4: U4.B2@-386,578.52 -376.01,568.53 -363.62,568.53 -323.08,528 -306.87,528 -160.87,382 -157.44,382 -133.44,358 -133.44,345.44 v2(-133,345)
RXD1: U1.148 U4.C5 | length 335.9
  Top w3.63: U1.148@212.6,194.88 232.88,194.88 237.83,199.83 v2(237.83,200.21)
  Inner3 w3.63: v2(237.83,200.21) 239.55,200.21 244.52,205.18 245.48,205.18 268.83,228.53 268.83,252.13 305.3,288.6 308.4,288.6 v2(307,290)
  Bottom w3.63: v2(307,290) 307,349.52 392,434.52 U4.C5@392,440
RXD2: U1.48 U4.B14 | length 291.1
  Top w4: v2(-286,180) -273.7,192.3 -262.43,192.3 U1.48@-259.84,194.88
  Inner3 w4: U4.B14@-393,-14 -362,-14 -350.55,-2.55 -350.55,39.44 -339.27,50.72 -339.27,66.93 -342,69.66 -342,108.66 -303.51,147.15 -303.51,162.49 v2(-286,180)
SD_CD: U1.50 U4.B16 | length 372.4
  Top w4: v2(-288,161) -275.89,173.11 -261.93,173.11 U1.50@-259.84,175.2
  Inner3 w4: U4.B16@-393.7,-113.78 -363.78,-113.78 -355,-105 -355,-40.66 -342.55,-28.21 -342.55,36.13 -331.27,47.41 -331.27,70.24 -334,72.97 -334,105.34 -295.51,143.83 -295.51,152.96 -288,160.47 v2(-288,161)
SD_CLK: R22.1 U4.B19 | length 504.3
  Top w4: R22.1@-350.39,150.59 -348.43,150.59 -318.84,121 -296,121 -293.8,118.8 -293.94,118.65 v2(-293.9,118.57)
  Inner3 w4: U4.B19@-393.7,-263.78 -388.28,-258.36 -370.36,-258.36 -353,-241 -353,-129.44 -339,-115.44 -339,-60.79 -329.21,-51.01 -329.21,-40.6 -326.55,-37.94 -326.55,-23.55 -308,-5 -308,48.05 -301.27,54.78 -301.27,110.38 -293.9,117.74 v2(-293.9,118.57)
SD_CLK_1: R22.2 U1.54 | length 106
  Top w4: R22.2@-348,172 -348,171.82 -308.7,132.52 -288.04,132.52 -285.56,135 -260.67,135 U1.54@-259.84,135.83
SD_CMD: U1.55 U4.B20 | length 577.6
  Top w4: U1.55@-225.2,125.99 -223.33,127.85 -204.15,127.85 v2(-203,129)
  Inner3 w4: v2(-307,-255) -296.55,-244.55 -296.55,-151.51 -296.86,-151.2 -296.86,-138.27 -318.5,-116.63 -318.5,-72.31 -295.18,-49 -289.21,-49 -267.49,-27.28 -267.49,31.64 -254,45.13 -254,61.29 -236,79.29 -236,100.87 -209.02,127.85 -204.15,127.85 v2(-203,129)
  Bottom w4: U4.B20@-387,-308 -387,-307.08 -376.01,-296.09 -348.09,-296.09 v2(-307,-255)
SD_D0: U1.52 U4.B18 | length 429.2
  Top w4: v2@-284.42,145.91 -276.4,153.93 -261.43,153.93 U1.52@-259.84,155.51
  Inner3 w4: U4.B18@-389,-209.08 -361.51,-181.59 -361.51,-126.64 -347,-112.13 -347,-47.08 -334.55,-34.63 -334.55,32.81 -323.27,44.1 -323.27,73.55 -326,76.29 -326,102.03 -284.51,143.52 v2(-284.51,146)
SD_D1: U1.51 U4.B17 | length 455.6
  Top w4: U1.51@-225.2,165.36 -225.02,165.18 -203.18,165.18 v2(-203,165)
  Inner3 w4: v2(-307.5,-82.84) -306.71,-82.06 -306.71,-71.84 -291.87,-57 -285.89,-57 -254.28,-25.38 -254.28,33.54 -246,41.82 -246,57.97 -224,79.97 -224,101.56 -207.56,118 -195,118 -186,127 -186,146.85 -203,163.85 v2(-203,165)
  Bottom w4: U4.B17@-381,-162 -368.01,-162 -353.79,-147.77 -353.79,-130.23 -307.5,-83.94 v2(-307.5,-82.84)
SD_D2: U1.57 U4.B22 | length 643
  Top w4: U1.57@-225.2,106.3 -203.7,106.3 v2(-203,107)
  Inner3 w4: v2(-304,-112) -296.86,-104.86 -296.86,-85.99 -296.5,-85.63 -296.5,-72.94 -288.56,-65 -282.58,-65 -238,-20.42 -238,54.66 -203,89.66 v2(-203,107)
  Bottom w4: U4.B22@-392,-411 -368.01,-411 -339.9,-382.89 -339.9,-338.62 -296,-294.71 -296,-120 v2(-304,-112)
SD_D3: U1.56 U4.B21 | length 576.4
  Top w4: v2(-281,124) -277.12,124 -269.26,116.14 U1.56@-259.84,116.14
  Inner3 w4: U4.B21@-393.7,-363.78 -368.78,-363.78 -331,-326 -331,-257.22 -323,-249.22 -323,-123.44 -326.5,-119.95 -326.5,-59.6 -321.21,-54.32 -321.21,-43.92 -318.55,-41.25 -318.55,-26.86 -300,-8.31 -300,44.74 -293.06,51.67 -293.06,102.94 -281,115 v2(-281,124)
SD_WP: U1.49 U4.B15 | length 394
  Top w4: U1.49@-225.2,185.04 v2(-203,185) v2(-203,185)
  Inner3 w4: v2(-310.21,-48.47) -310.21,-29.84 -292,-11.63 -292,18.8 -283.05,27.75 -282.69,27.75 -263.35,47.1 -263.35,63.25 -244,82.6 -244,144 v2(-203,185)
  Bottom w4: U4.B15@-392,-64 -316.31,-64 -316.31,-62.17 -311.36,-57.22 -311.36,-49.62 v2(-310.21,-48.47)
SPI_CLK: R4.1 R21.2 U1.25 U4.A9 | length 478.4
  Top w4: R21.2@-107,367 -106.87,367.13 R21.2@-106.3,367.13 R4.1@-82.68,367.13 ; R4.1@-83,367 -80.58,367 -68.15,354.57 -68.15,350.85 v1@-70,349 ; U1.25@-72.83,322.84 -72.83,346.17 v1@-70,349 ; v1(-67,346) v1@-70,349
  Inner3 w4: U4.A9@-100,716.22 -100,650.49 -55.8,606.3 -55.8,452.2 -70.62,437.38 -70.62,359 -70,358.39 -70,353.36 -68.15,351.51 -68.15,347.15 v1(-67,346)
SPI_CLK_1: R4.2 U3.6 | length 166.5
  Top w4: R4.2@-82.68,388.78 -80.71,388.78 -77.79,391.7 -77.79,400.82 22.39,501 U3.6@32,501
SPI_CS0: R5.1 U1.28 U3.1 U4.A12 | length 898.9
  Top w4: v2(-331,554) -334.65,550.35 R5.1@-334.65,538.39 -332.68,538.39 R5.1@-329.76,541.31 ; U3.1@-291.55,596.06 -286.61,601 U3.1@-280,601 ; U3.1@-268.05,602.56 -246,624.61 U4.A12@-246,710 ; U1.28@-102.36,288.19 -102.18,288.01 -102.18,264.18 v2(-102,264)
  Top w8: U3.1@-276.55,602.56 U3.1@-268.05,602.56
  Inner3 w4: U4.A12@-253,723 -253,662.26 -95,504.26 -95,396.44 -100,391.44 -100,349.76 -100,308.69 -102,306.69 v2(-102,264)
  Bottom w4: v2(-331,554) -253,632 U4.A12@-253,707
SPI_CS1: R19.2 R20.2 U1.24 U4.A8 | length 621.8
  Top w4: v2(-63,264) U1.24@-62.99,288.19 ; R19.2@-10.85,367.15 R20.2@10.98,367.15 ; v2(-0.81,354.19) 6.11,361.11 6.11,364.25 R20.2@9.01,367.15
  Inner3 w4: v2(-63,264) -63,333 -46.35,349.65 -46.35,423 ; U4.A8@-50,716.22 -46.35,712.57 -46.35,423 ; v2(-29,423) -46.35,423
  Inner4 w4: v2(-29,423) -29,422.66 -24,417.66 -24,377 -1.19,354.19 v2(-0.81,354.19)
SPI_MISO: U1.26 U3.2 U4.A10 | length 764.7
  Top w4: U3.2@-276.55,552.56 -228.56,552.56 v2(-228,552) ; U1.26@-82.68,288.19 -82.68,264.68 v2(-82,264)
  Inner3 w4: U4.A10@-144,714 -144,683.18 -63.8,602.98 -63.8,457.2 -78.62,442.38 -78.62,353.67 -78,353.06 -78,345.47 -82,341.47 v2(-82,264)
  Bottom w4: v2(-228,552) -228,595.92 -167.69,656.24 -167.69,698.53 -153.22,713 U4.A10@-145,713
SPI_MOSI: R18.2 U1.27 U3.5 U4.A11 | length 673.3
  Top w4: R18.2@-130.83,370 -117.03,356.2 -106.44,356.2 -100,349.76 -100,348.76 -94.25,343.01 -94.25,324.56 U1.27@-92.52,322.84 ; -94.49,343.25 -89,348.74 v2(-89,350.02) ; v2(1.57,444.43) 3.19,444.43 4.81,446.06 25.95,446.06 U3.5@32.45,452.56
  Inner3 w4: U4.A11@-200,716.22 -200,665 -87,552 -87,393.13 -89,391.13 v2(-89,350.02)
  Bottom w4: v2(-89,350.02) -48,391.03 -48,419.56 -32.35,435.2 -6.8,435.2 1.57,443.57 v2(1.57,444.43)
SPIFLASH_NRESET: R7.1 U3.7 | length 435.4
  Top w4: R7.1@-333.72,596.72 -330.31,600.13 -310.87,600.13 v2(-309.72,601.28) ; v2(-245,564) -245,566.59 -192.53,619.06 -51.56,619.06 -51.5,619 -42.49,619 23.95,552.56 U3.7@32.45,552.56
  Inner3 w4: v2(-309.72,601.28) -308.57,600.13 -300.85,600.13 -296.72,596 -277,596 v2(-245,564)
SPIFLASH_NWP: R6.1 U3.3 | length 107.6
  Top w4: R6.1@-336,477 -334.28,477 -319.14,461.86 v2(-319.14,461.26) ; v2(-307,505) -278.99,505 U3.3@-276.55,502.56 ; U3.3@-284.61,503 U3.3@-281,503
  Inner3 w4: v2(-319.14,461.26) -307,473.4 v2(-307,505)
TXD0: R17.2 U1.30 U4.B1 | length 719.4
  Top w4: v2(-276,354) -275.59,354.41 R17.2@-275.59,367.13 ; v2(-123,264) -122.52,264.48 -122.52,287.71 U1.30@-122.05,288.19
  Inner3 w4: U4.B1@-399,645 -399,641.52 U4.B1@-393.7,636.22 -360.22,636.22 -266.79,542.79 -266.79,499.23 -244.28,476.72 -157.56,390 -154.13,390 -122,357.87 -122,265 v2(-123,264) ; -244,477 -235,486 v2(-235,487)
  Bottom w4: v2(-276,354) -276,384.44 -263,397.44 -263,459 v2(-235,487)
TXD1: R14.1 U1.147 U4.C6 | length 583.8
  Top w3.63: v2(144,191) 149.96,185.04 U1.147@177.95,185.04
  Top w4: R14.1@216,430.17 217.97,430.17 242.14,406 346.18,406 363.18,389 U4.C6@392,389
  Inner3 w3.63: v2(144,191) 142.78,192.22 142.78,200.19 142.73,200.24 142.73,209.2 154.89,221.37 175.37,221.37 223.82,269.82 251.71,269.82 275.51,293.61 275.51,309.12 352.39,386 U4.C6@396,386
TXD2: U1.47 U4.B13 | length 344.6
  Top w4: U1.47@-225.2,204.73 -203.27,204.73 v2(-203,205)
  Inner3 w4: U4.B13@-387,37 -387,37.07 -376.01,48.06 -353.71,48.06 -347.27,54.5 -347.27,63.61 -366,82.34 -366,117.56 -359.56,124 -348.57,124 -346.22,126.34 -346.22,135.33 -276.56,205 v2(-203,205)
USB_D+: U1.61 U4.B23 | length 727.1
  Top w3.6: U4.B23@-393.7,-463.78 -375.82,-481.66 -375.82,-482.37 -373.71,-484.48 -368.61,-484.48 -361.4,-477.27 -361.4,-48.24 -308.2,4.96 -308.2,31.47 -308.38,31.66 -308.38,54.42 -299.04,63.77 v1(-282.06,63.77)
  Top w3.61: U1.61@-225.2,66.93 -225.15,66.88 -205.07,66.88 v1(-205.02,66.83)
  Bottom w3.61: v1(-282.06,63.77) -281.34,64.49 -271.65,64.49 -268.9,67.24 -205.42,67.24 v1(-205.02,66.83)
USB_D-: U1.62 U4.B24 | length 651.2
  Top w3.6: U4.B24@-393.7,-513.78 -375.82,-495.9 -375.82,-495.19 -373.71,-493.08 -365.05,-493.08 -352.8,-480.83 -352.8,-51.8 -299.6,1.4 -299.6,35.04 -299.78,35.22 -299.78,50.86 -297.67,52.97 -273.49,52.97 -269.42,57.04 U1.62@-259.89,57.04
USB_VRT: R24.1 U1.59 | length 195.1
  Top w4: R24.1@-333.79,26.79 -333.29,26.29 -319.29,26.29 v2(-319,26) ; U1.59@-225.2,86.62 -200.62,86.62 v2(-195,81)
  Inner4 w4: v2(-319,26) -319,27.17 -293.4,52.77 -277.51,52.77 -249.28,81 v2(-195,81)
VDD_FLASH: R6.2 R7.2 U3.8 U4.A7 | length 659.7
  Top w8: R6.2@-335,454 -332.94,454 -326.94,448 v2(-308,448) ; R7.2@-334.65,575.79 -306,575.79 ; v2(-305,564) -306,565 -306,575.79 ; U4.A7@0,716.22 -2.49,713.73 -2.49,629 ; U3.8@32.45,602.56 23.95,602.56 -2.49,629 ; -306,575.79 -255.21,575.79 -201.94,629.06 -47.42,629.06 -47.36,629 -2.49,629
  Bottom w8: v2(-308,448) -290,466 -290,521 -305,536 v2(-305,564)
XTALIN: U1.151 X3.3 | length 329.8
  Top w3.63: v2(146,229) 147.72,229 149.65,227.07 175.29,227.07 U1.151@177.95,224.41 ; X3.3@322,358 v2(322,395)
  Inner3 w3.63: v2(146,229) 168,229 218.18,279.18 226.88,279.18 269.88,322.18 273.48,322.18 322,370.7 v2(322,395)
pads on no net: U1.9 U1.11 U1.12 U1.37 U1.153 U2.A2 U2.A8 U2.E2 U2.E8 U2.R3 U2.R7

## Polygon pours and split planes (outlines as drawn)
LXBK on Top "Top-LXBK" (solid, remove dead copper, pour order 1): 194,-92 194,-117.24 215,-117.24 215,-186.52 292.32,-186.52 292.32,-129.11 252,-129.11 252,-92
1V2 on Top "Top-1V2" (solid, remove dead copper, pour order 0): 194.88,-191.87 194.88,-261.88 287.36,-261.88 287.36,-236.11 358.13,-236.11 358.13,-157.25 296.26,-157.25 296.26,-191.87
1V2 on Bottom "1V2_L06_P002" (solid, pour order 2): -323,132 -185,132 -185,248 -51.18,248 -51.18,374.02 -15.75,374.02 -15.75,248 143,248 143,173 267.72,173 267.72,93 161,93 161,39.37 271.65,39.37 271.65,11.81 153,11.81 153,-60 242,-60 242,-133.86 354.33,-133.86 354.33,-271.65 188.98,-271.65 188.98,-117 94.49,-117 -63,-117 -63,-177.17 -122.05,-177.17 -122.05,-117 -222,-117 -222,82.68 -323,82.68
1V8 on PWR (split plane): 183.88,-157.48 184.27,-159.43 185.37,-161.09 187.03,-162.19 188.98,-162.58 223.25,-162.58 223.25,-318.9 223.64,-320.85 224.74,-322.5 226.4,-323.61 228.35,-324 298.05,-324 298.05,-664.19 -388.6,-664.19 -388.6,51.9 183.88,51.9
3V3 on PWR (split plane): 393.29,-664.94 340.65,-664.94 340.6,-664.89 338.95,-663.79 337,-663.4 335.05,-663.79 333.4,-664.89 333.36,-664.94 308.25,-664.94 308.25,-318.9 307.86,-316.95 306.75,-315.29 305.1,-314.19 303.15,-313.8 233.44,-313.8 233.44,-157.48 233.06,-155.53 231.95,-153.88 230.3,-152.77 228.35,-152.38 194.07,-152.38 194.07,57 193.69,58.95 192.58,60.6 190.93,61.71 188.98,62.1 -393.29,62.1 -393.29,716.12 393.29,716.12
GND on GND (split plane): 403.3,-674.95 -403.3,-674.95 -403.3,726.13 403.3,726.13

## Other copper
Bottom:
  rectangle net GND: -141.73,-31.5 94.49,204.72
PWR (plane layer: these items are gaps in the copper):
  lines w10: -358.62,-681.5 -357.99,-680.87 ; 254.18,-669.29 -393.7,-669.29 ; 337,-668.5 350,-681.5 ; -393.7,-669.29 -393.7,57 188.98,57 188.98,-157.48 228.35,-157.48 228.35,-318.9 303.15,-318.9 303.15,-669.29 -393.7,-669.29

## Silkscreen, mask and mechanical layers (free items; w line width, h text height)
Silkscreen Top:
  text "NW0101 Rev.A" at 295.28,-641.73 h20 r90
Drill Drawing:
  lines w1: -200.79,0 -200.76,0 ; 0,-295.28 0.03,-295.28 ; 23.62,122.05 23.65,122.05 ; 0,295.28 0.03,295.28 0,295.28 ; 200.79,0 200.81,0
  lines w10: -431.89,122.05 -26.38,122.05 ; -431.89,295.28 -50,295.28 ; -381.89,-27.95 -381.89,122.05 ; -381.89,445.28 -381.89,295.28 ; -350.79,604.3 -200.79,604.3 ; -200.79,50 -200.79,654.3 ; 50,-295.28 631.5,-295.28 ; 50,295.28 631.5,295.28 ; 200.79,50 200.79,654.3 ; 350.79,604.3 200.79,604.3 ; 581.5,-67.5 581.5,-295.28 ; 581.5,67.5 581.5,295.28 ; -381.89,122.05 -406.89,22.05 -356.89,22.05 -381.89,122.05 ; -381.89,295.28 -356.89,395.28 -406.89,395.28 -381.89,295.28 ; -200.79,604.3 -300.79,629.3 -300.79,579.3 -200.79,604.3 ; 200.79,604.3 300.79,579.3 300.79,629.3 200.79,604.3 ; 581.5,-295.28 606.5,-195.28 556.5,-195.28 581.5,-295.28 ; 581.5,295.28 556.5,195.28 606.5,195.28 581.5,295.28
  text "10.2mm" at -135.5,578.3 h50
  text "4.4mm" at -675.53,407.78 h50
  text "15.0mm" at 434.91,-37.5 h50